# Altium PCB PCB1.PcbDoc
Units mm, origin at the board's own origin, x right, y up, seen from the top; angles counter-clockwise.
Board outline 32 x 41 mm, 2 copper layers (Top Layer, Bottom Layer); 3 components, 20 nets, 68 pads, 0 vias.
Unrouted connection lines stored in the file: 40.
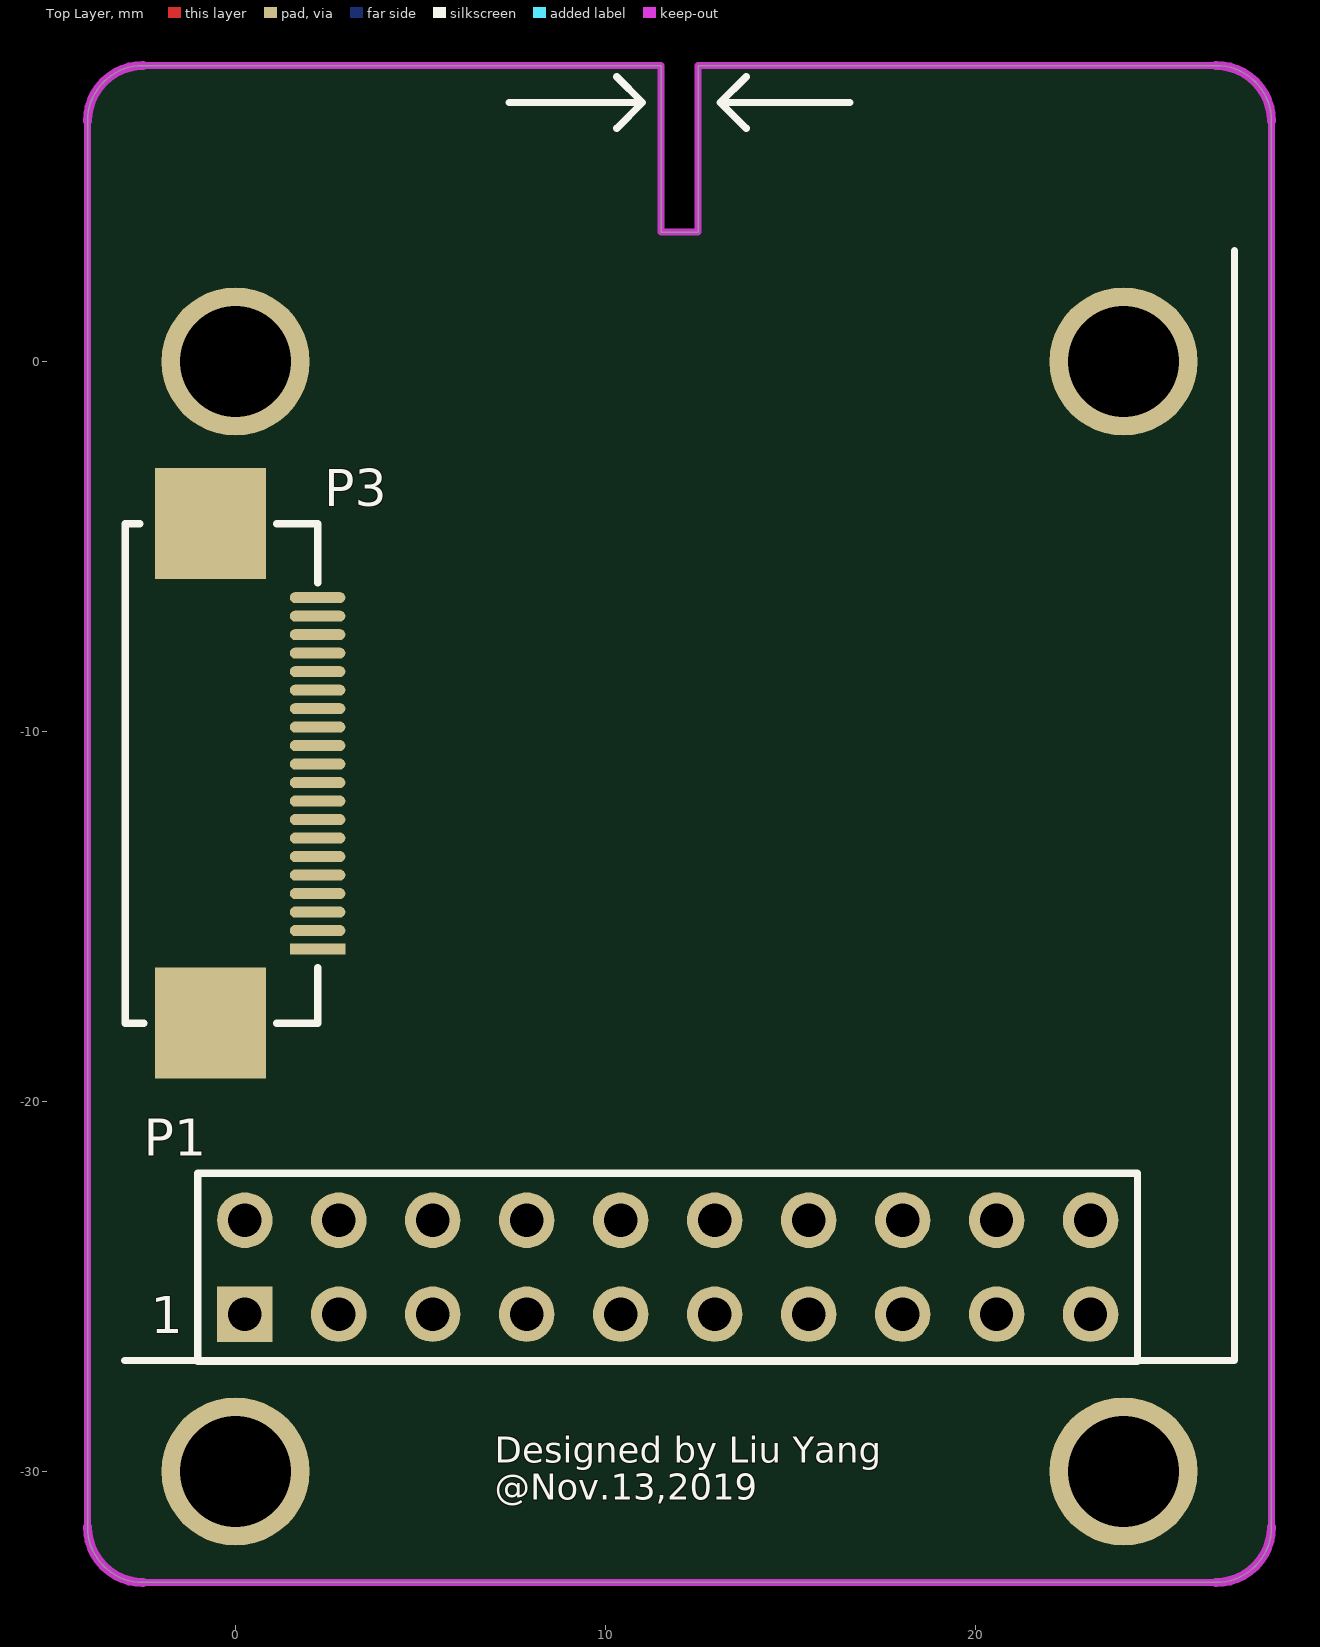
[diagram p0: Top Layer view]
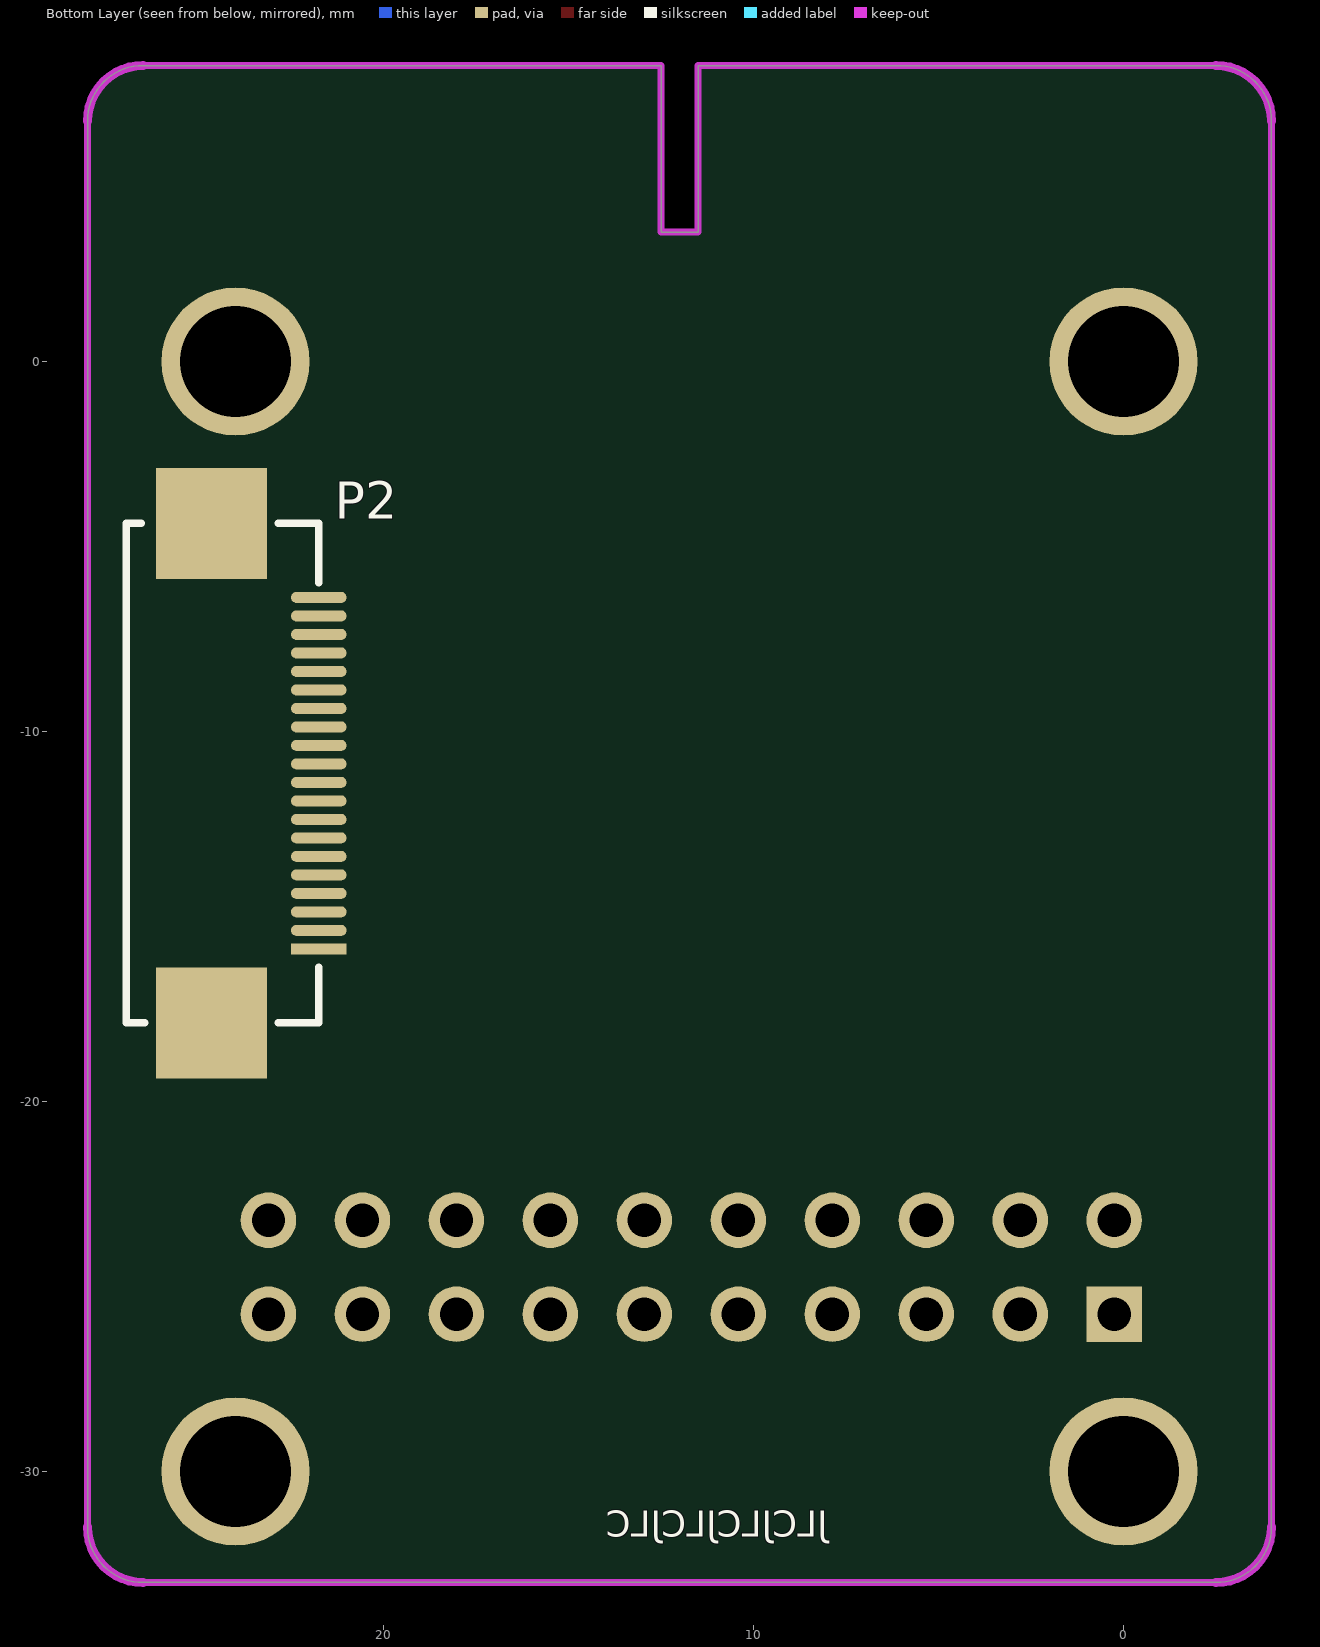
[diagram p1: Bottom Layer view, seen from below]

## Layer stack, top to bottom
Top Solder: solder mask 0.0102, Solder Resist, Dk 3.5
Top Layer: signal copper 0.0356
Dielectric 1: dielectric 0.32, FR-4, Dk 4.8
Bottom Layer: signal copper 0.0356
Bottom Solder: solder mask 0.0102, Solder Resist, Dk 3.5

## Board outline
-4,-31.5 -4,6.5 cw(c-2.5,6.5) -2.5,8 11.5,8 11.5,3.5 12.5,3.5 12.5,8 26.5,8 cw(c26.5,6.5) 28,6.5 28,-31.5 cw(c26.5,-31.5) 26.5,-33 -2.5,-33 cw(c-2.5,-31.5)

## Design rules (kind name [scope] priority, off if disabled: settings)
Clearance [All] p1: gap=0.2
PolygonConnect [All] p1: connectstyle=Relief reliefconductorwidth=0.254 reliefentries=4 polygonreliefangle="90 Angle" airgapwidth=0.254
RoutingVias [All] p1: holewidth=0.6 width=1 viastyle="Through Hole" minholewidth=0.711 minwidth=1.27 maxholewidth=0.711 maxwidth=1.27
SolderMaskExpansion [All] p1: expansion=0.102
Width [All] p1: maxlimit=0.508 minlimit=0.2 preferedwidth=0.254
30 further rules are at their usual default settings.

## Components (designator, comment, footprint, x,y, rotation, side; value= is the part's Value field where it differs from the comment)
P1 "Header 10X2" HDR2X10 0.25,-25.75 r0 top
P2 "Header 22" FPC20Pin 21.75,-15.875 r0 bottom
P3 "Header 22" FPC20Pin 2.217,-15.881 r180 top

## Footprints (in the part's own frame and the unit in brackets; to place one, negate y for a bottom-side part, rotate by r counter-clockwise, add the part's x,y. Pads: shape width x height; smd on the part's side, far side on the other; paste and mask are expansions set on the pad)
FPC20Pin [mm]
  rect 1.5x0.3 smd: 1(0,0)
  oval 1.5x0.3 smd: 2(0,-0.5) 3(0,-1) 4(0,-1.5) 5(0,-2) 6(0,-2.5) 7(0,-3) 8(0,-3.5) 9(0,-4) 10(0,-4.5) 11(0,-5) 12(0,-5.5) 13(0,-6) 14(0,-6.5) 15(0,-7) 16(0,-7.5) 17(0,-8) 18(0,-8.5) 19(0,-9) 20(0,-9.5)
  rect 3x3 smd: 21(2.9,2) 22(2.9,-11.5)
  silkscreen extent 0,-11.5 5.2,2
HDR2X10 [mm] "Connector; Header; 10x2 Position"
  rect 1.5x1.5 hole 0.9: 1(0,0)
  round 1.5 hole 0.9: 2(0,2.54) 3(2.54,0) 4(2.54,2.54) 5(5.08,0) 6(5.08,2.54) 7(7.62,0) 8(7.62,2.54) 9(10.16,0) 10(10.16,2.54) 11(12.7,0) 12(12.7,2.54) 13(15.24,0) 14(15.24,2.54) 15(17.78,0) 16(17.78,2.54) 17(20.32,0) 18(20.32,2.54) 19(22.86,0) 20(22.86,2.54)
  silkscreen extent -1.27,-1.27 24.13,3.81

## Part data
P1: "Header, 10-Pin, Dual row"
P2 P3: "Header, 22-Pin"

## Free pads (board coordinates)
  round 4 hole 3: 0(0,0) 1(24,0) 2(24,-30) 3(0,-30)

## Nets (pads, with @x,y where several pads share a name; then routed paths per layer and width w, separated by ;. In a path a pad name is that pad's centre, name@x,y a point inside that pad or via, vN(x,y) a via of type N, cw(c..) or ccw(c..) an arc to the next point about the centre after c; other vN are vias at no path point)
D1: P1.3 P2.3 P3.3
D2: P1.4 P2.4 P3.4
D3: P1.5 P2.5 P3.5
D4: P1.6 P2.6 P3.6
D5: P1.7 P2.7 P3.7
D6: P1.8 P2.8 P3.8
D7: P1.9 P2.9 P3.9
D8: P1.10 P2.10 P3.10
D9: P1.11 P2.11 P3.11
D10: P1.12 P2.12 P3.12
D11: P1.13 P2.13 P3.13
D12: P1.14 P2.14 P3.14
D13: P1.15 P2.15 P3.15
D14: P1.16 P2.16 P3.16
D15: P1.17 P2.17 P3.17
D16: P1.18 P2.18 P3.18
D17: P1.19 P2.19 P3.19
D18: P1.20 P2.20 P3.20
GND: P1.2 P2.2 P3.2
VCC: P1.1 P2.1 P3.1
pads on no net: P2.21 P2.22 P3.21 P3.22

## Keep-outs
Keep-Out Layer:
  lines w0.2: -4,-31.5 -4,-28 -4,4 -4,6.5 ; -2.5,-33 26.5,-33 ; -2.5,8 4,8 11.5,8 11.5,3.5 12.5,3.5 12.5,8 20,8 26.5,8 ; 28,-31.5 28,-28 28,4 28,6.5
  lines w0.254: -4,-31.5 ccw(c-2.5,-31.5) -2.5,-33 ; -4,6.5 cw(c-2.5,6.5) -2.5,8 ; 26.5,-33 ccw(c26.5,-31.5) 28,-31.5 ; 26.5,8 cw(c26.5,6.5) 28,6.5

## Silkscreen, mask and mechanical layers (free items; w line width, h text height)
Top Overlay:
  lines w0.2: -3,-27 27,-27 27,3 ; 7.4,7 11,7 ; 10.3,6.3 11,7 ; 10.3,7.7 11,7 ; 13.8,6.3 13.1,7 ; 13.8,7.7 13.1,7 ; 16.6,7 13.1,7 ; 11,7 11,7 ; 13.1,7 13.1,7 ; 13.1,7 13.1,7
  text "Designed by Liu Yang" at 7,-30 h1.2
  text "@Nov.13,2019" at 7,-31 h1.2
Bottom Overlay:
  text "JLCJLCJLCJLC" at 8,-32 h1.2

## Text inside footprints (layer, text, board x,y; h text height)
P1: Top Overlay "1" at -2.29,-26.258 h1